# Altium PCB sbattery.PcbDoc (part 1 of 2)
Units mil, origin at the board's own origin, x right, y up, seen from the top; angles counter-clockwise.
Board outline 1265 x 1660 mil, 2 copper layers (Top Layer, Bottom Layer); 16 components, 14 nets, 58 pads, 16 vias.
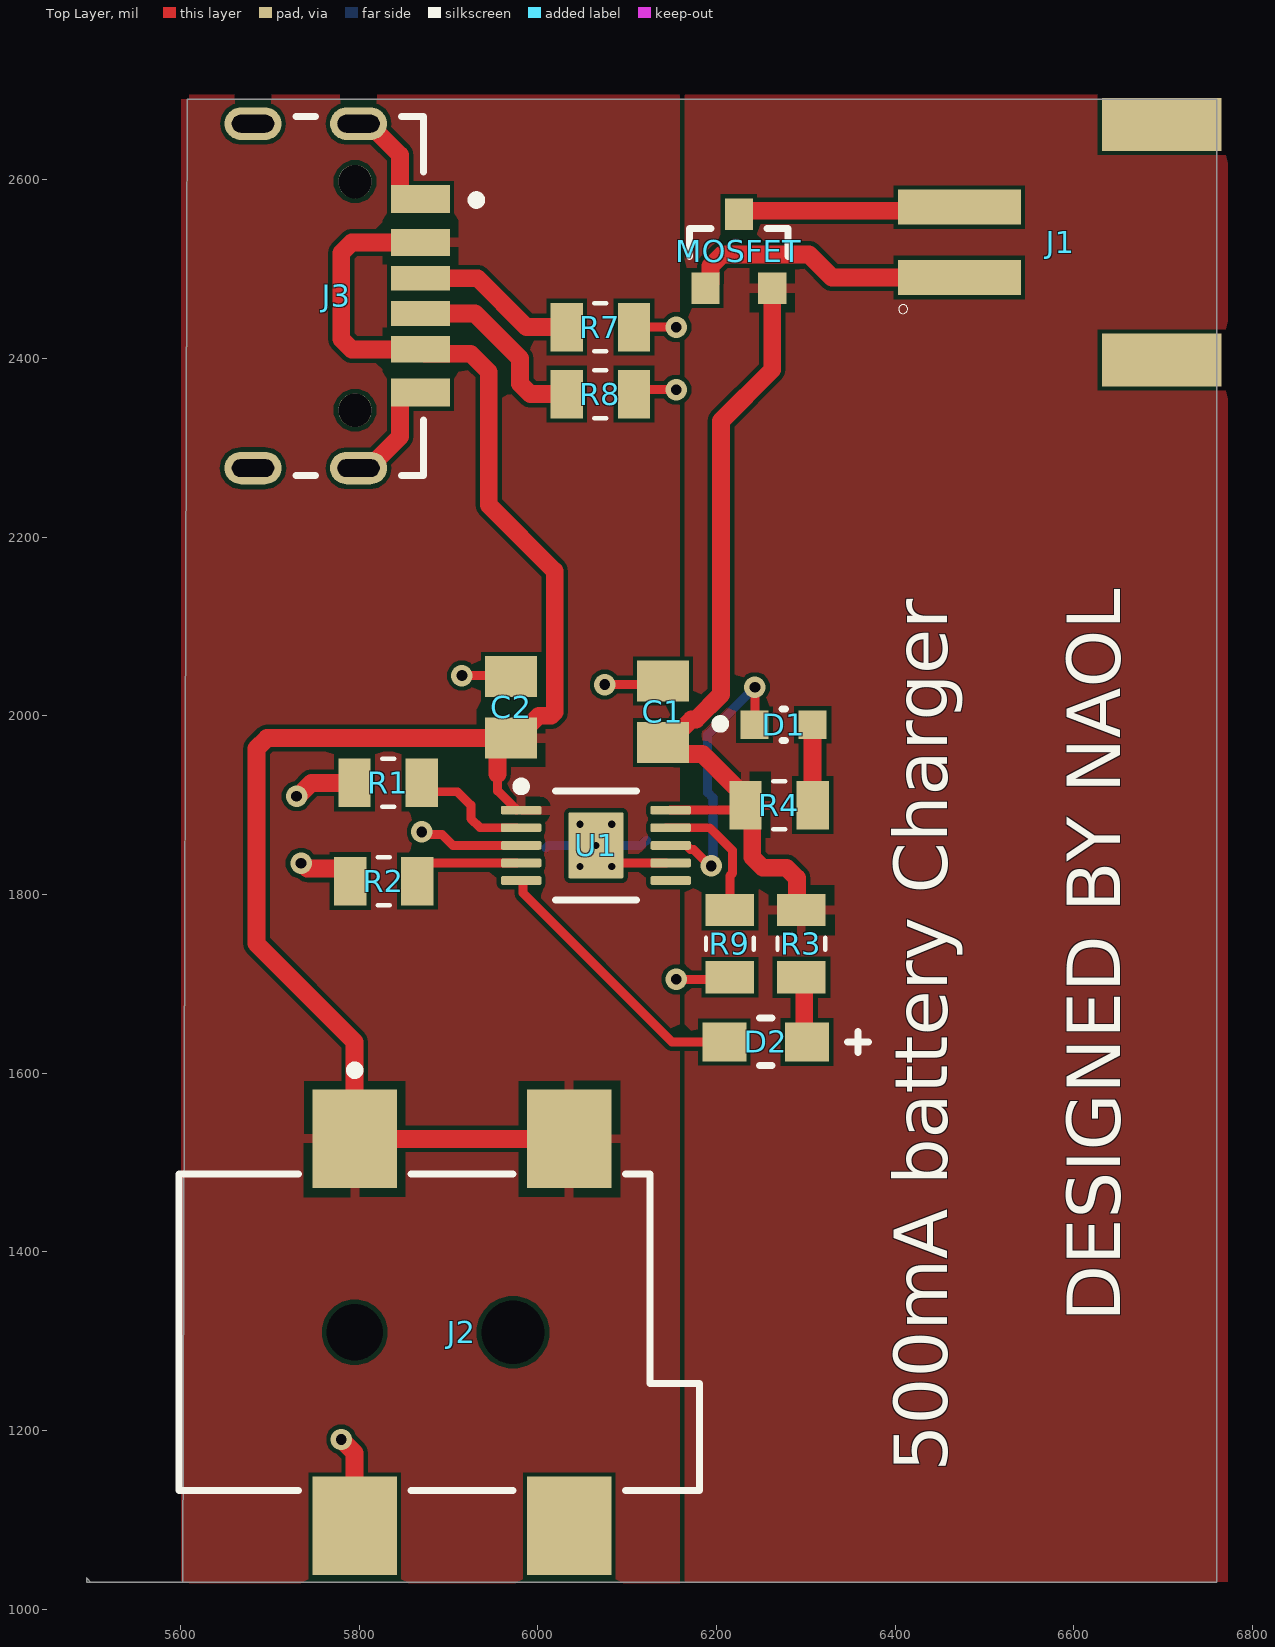
[diagram p0: Top Layer view]
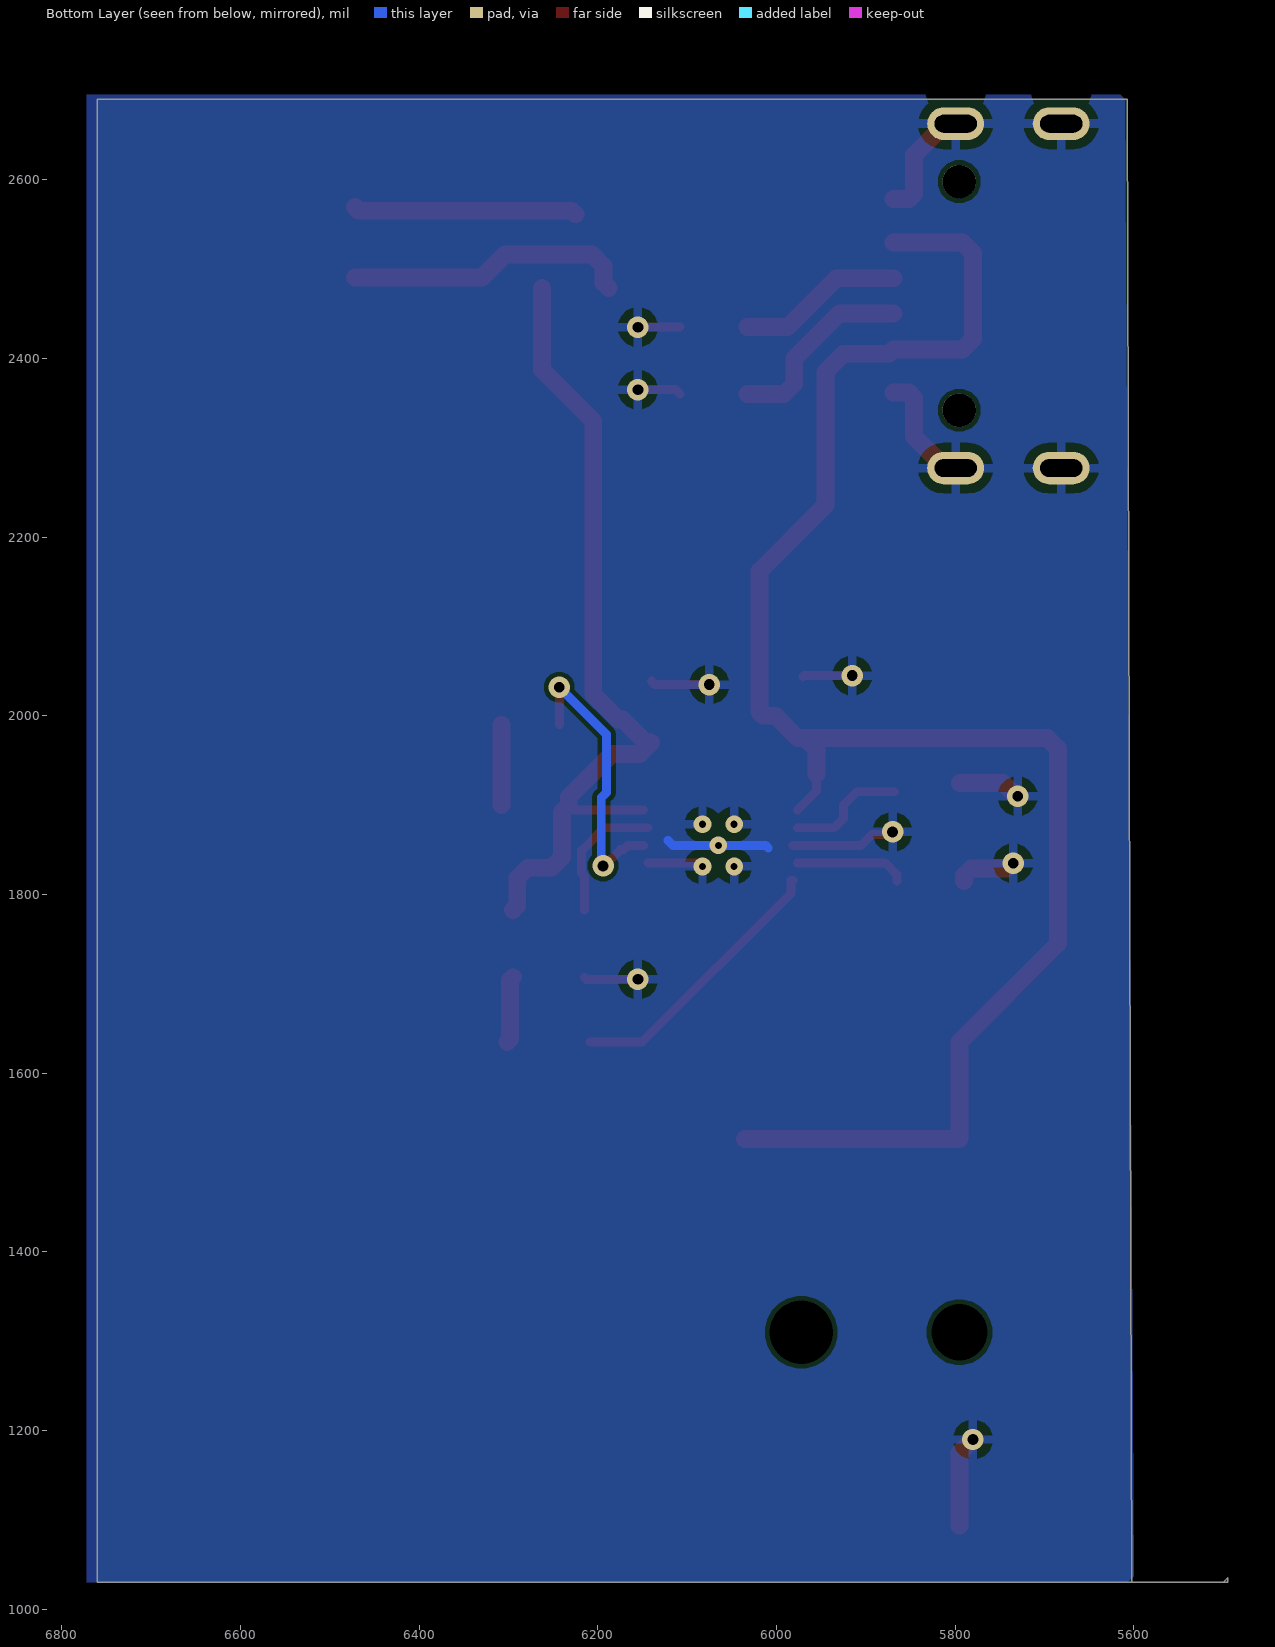
[diagram p1: Bottom Layer view, seen from below]
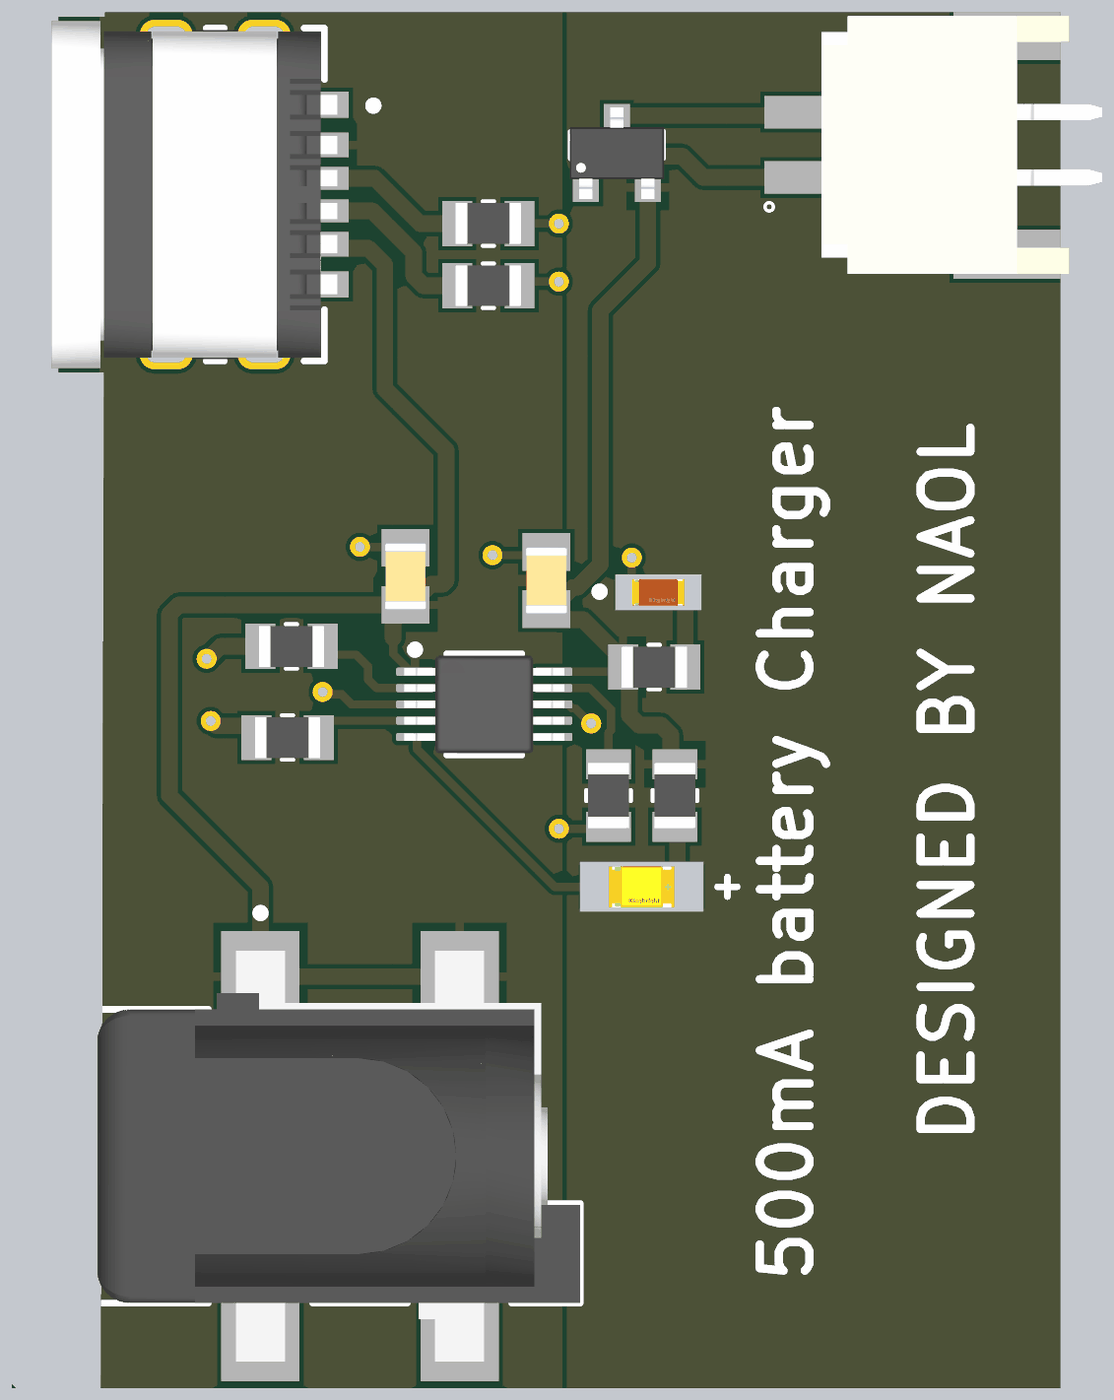
[diagram p2: 3D render of the assembled board from above, using the file's embedded part models]

## Layer stack, top to bottom
Top Solder: solder mask 0.4, Solder Resist, Dk 3.5
Top Layer: signal copper 1.4
Dielectric 1: dielectric 12.6, FR-4, Dk 4.8
Bottom Layer: signal copper 1.4
Bottom Solder: solder mask 0.4, Solder Resist, Dk 3.5

## Board outline
5607.46,2690 6760,2690 6760,1030 5500,1030 5495,1035 5495,1030 5602.45,1030

## Design rules (kind name [scope] priority, off if disabled: settings)
Clearance [All] p1: gap=5 ignorepadtopadclearanceinfootprint=FALSE
MinimumSolderMaskSliver [All] p1: minsoldermaskwidth=8
PolygonConnect [All] p1: connectstyle=Relief reliefconductorwidth=10 reliefentries=4 polygonreliefangle="90 Angle" airgapwidth=10
RoutingVias [All] p1: holewidth=28 width=50 viastyle="Through Hole" minholewidth=28 minwidth=50 maxholewidth=28 maxwidth=50
SolderMaskExpansion [All] p1: expansion=0 istentingtop=FALSE
SupplyNets "Schematic Supply Nets_2" [InNet('VOUT')] p1: voltage=0.000
SupplyNets "Schematic Supply Nets_1" [InNet('VCC')] p2: voltage=0.000
SupplyNets "Schematic Supply Nets" [InNet('GND')] p3: voltage=0.000
Width [All] p1: maxlimit=100 minlimit=10 preferedwidth=10
29 further rules are at their usual default settings.

## Classes and differential pairs
component class sbattery: C1 C2 D1 D2 J1 J2 J3 MOSFET R1 R3 R4 R7 R8 R9 U1

## Components (designator, comment, footprint, x,y, rotation, side; value= is the part's Value field where it differs from the comment)
C1 "4u7F" CAPC2012X88N 6140,2004.45 r90 top value=4.7uF
C2 "4u7F" CAPC2012X88N 5970,2009.45 r90 top value=4.7uF
D1 "APT1608EC" FP-APT1608EC-MFG 6275,1990 r0 top
D2 "APT1608SGC" FP-APT2012MGC-MFG 6255,1635 r180 top
J1 "S2B-PH-SM4-TB" JST_S2B-PH-SM4-TB 6585,2530 r270 top
J2 "Jack Connector" CUI_PJ-002AH-SMT-TR 5915.08,1310 r0 top
J3 "usbc" FP-217176-0001-MFG 5775,2470 r270 top
MOSFET "P CHANNEL" SOT23-3 6225,2520 r270 top
R1 "2k2Ω" RESC2012X60N 5832.4,1925 r0 top value=2.2kΩ
R2 "4k32Ω" RESC2012X60N 5827.6,1815 r0 top value=4.32kΩ
R3 "1k5Ω" RESC2012X60N 6295,1745 r90 top value=1.5kΩ
R4 "1k5Ω" RESC2012X60N 6270,1900 r180 top value=1.5kΩ
R7 "5k1Ω" RESC2012X60N 6070,2435 r180 top value=5.1kΩ
R8 "5k1Ω" RESC2012X60N 6070,2360 r180 top value=5.1kΩ
R9 "10kΩ" RESC2012X60N 6215,1745 r90 top
U1 "BQ24092DGQR" DGQ0010D_L 6065,1855 r0 top

## Footprints (in the part's own frame and the unit in brackets; to place one, negate y for a bottom-side part, rotate by r counter-clockwise, add the part's x,y. Pads: shape width x height; smd on the part's side, far side on the other; paste and mask are expansions set on the pad)
CAPC2012X88N [mm]
  rect 1.16x1.47 smd: 1(-0.875,0) 2(0.875,0)
  body extent -1.02,-0.64 1.02,0.64, height 1.4
CUI_PJ-002AH-SMT-TR [mm]
  rect 2.4x2.8 smd: 1(-3.05,5.5) 1(3.05,5.5) 2(-3.05,-5.5) 3(3.05,-5.5)
  round 0 hole 1.6: MH1(-3.05,0)
  round 0 hole 1.8: MH2(1.45,0)
  silkscreen extent -8.05,-4.5 6.75,7.57, body extent -8.05,-6.3 6.75,6.3, height 11.2
DGQ0010D_L [mm]
  rrect40% 1.15x0.25 smd: 1(-2.125,1) 2(-2.125,0.5) 3(-2.125,0) 4(-2.125,-0.5) 5(-2.125,-1) 6(2.125,-1) 7(2.125,-0.5) 8(2.125,0) 9(2.125,0.5) 10(2.125,1)
  rrect6% 1.57x1.88 smd: 11(0,0)
  silkscreen extent -2.25,-1.55 1.15,1.8, body extent -2.45,-1.5 2.45,1.5, height 0.94
FP-217176-0001-MFG [mm]
  rrect100% 0.92x1.62 hole 1.2 slot 0.5 at 0 deg paste-2539.97 mask+0: 1(-4.895,0.618) 2(4.895,0.618) 3(-4.895,-2.382) 4(4.895,-2.382)
  rect 0.8x1.67 smd paste+0 mask+0: C1(-2.75,2.383) C6(2.75,2.383)
  rect 0.76x1.67 smd paste+0 mask+0: C2(-1.52,2.383) C5(1.52,2.383)
  rect 0.7x1.67 smd paste+0 mask+0: C3(-0.5,2.383) C4(0.5,2.383)
  round 0.95 hole 0.95 unplated paste-2539.97 mask+0: ""(-3.25,0.518) ""(3.25,0.518)
  silkscreen extent -5.1,-1.16 5.1,4.09, body extent -5.46,-5.68 5.46,3.32, height 0.25
FP-APT1608EC-MFG [mm]
  rect 0.8x0.8 smd paste+0 mask+0: 1(-0.825,0) 2(0.825,0)
  silkscreen extent -1.92,-0.45 0.05,0.45, body extent -1.32,-0.55 1.33,0.55, height 0.25
FP-APT2012MGC-MFG [mm]
  rect 1.25x1.1 smd paste+0 mask+0: 1(-1.175,0) 2(1.175,0)
  silkscreen extent -2.93,-0.67 0.18,0.67, body extent -1.9,-0.77 1.9,0.77, height 0.25
JST_S2B-PH-SM4-TB [mm]
  rect 1x3.5 smd: 1(1,-2.875) 2(-1,-2.875)
  rect 1.5x3.4 smd: P1(3.35,2.875) P2(-3.35,2.875)
  silkscreen extent 1.77,-4.6 2.03,-4.35, body extent -3.95,-2.88 3.95,5.72, height 5.5
RESC2012X60N [mm]
  rect 0.92x1.38 smd: 1(-0.955,0) 2(0.955,0)
  silkscreen extent -0.17,-0.68 0.17,0.68, body extent -1,-0.63 1,0.63, height 0.6
SOT23-3 [mm]
  rect 0.9x0.8 smd: 1(1.05,-0.95) 2(1.05,0.95) 3(-1.05,0)
  silkscreen extent -0.65,-1.4 0.15,1.4, body extent -1.4,-1.45 1.4,1.45, height 1.25

## Part data
C1 C2: library part CC0805KFX7R7BB475, "Ceramic Capacitor, Ceramic, 16V, 10% +Tol, 10% -Tol, X7R, 0.15 TC, 4.7uF, Surface Mount, 0805", Case/Package=0805, Dielectric=X7R, Dielectric Material=Ceramic, LCSC part#=C20144929, Manufacturer="Yageo Group", Manufacturer Package Identifier=CC0805-0.85, Max Operating Temperature=125°C, Min Operating Temperature=-55°C, Supplier Part Number=13-CC0805KFX7R7BB475TR-ND, Voltage Rating=16V, Category="Ceramic Capacitors", China RoHS=Compliant, ComponentLink1Description=https://datasheet.octopart.com:443/CC0805KFX7R7BB475-Yageo-datasheet-177165144.pdf?src-supplier=IHS, ComponentLink1URL=https://datasheet.octopart.com:443/CC0805KFX7R7BB475-Yageo-datasheet-177165144.pdf?src-supplier=IHS, ComponentLink2Description=https://datasheet.octopart.com:443/CC0805KFX7R7BB475-Yageo-datasheet-78855689.pdf?src-supplier=Upverter, ComponentLink2URL=https://datasheet.octopart.com:443/CC0805KFX7R7BB475-Yageo-datasheet-78855689.pdf?src-supplier=Upverter, ComponentLink3Description=https://datasheet.octopart.com:443/CC0805KFX7R7BB475-Yageo-datasheet-181969532.pdf?src-supplier=Farnell, ComponentLink3URL=https://datasheet.octopart.com:443/CC0805KFX7R7BB475-Yageo-datasheet-181969532.pdf?src-supplier=Farnell, ComponentLink4Description=https://datasheet.octopart.com/CC0805KFX7R7BB475-Yageo-datasheet-10883670.pdf, ComponentLink4URL=https://datasheet.octopart.com/CC0805KFX7R7BB475-Yageo-datasheet-10883670.pdf, ComponentLink5Description=http://sigma.octopart.com:80/conflict_mineral_statement/Yageo-company-3.pdf?src-supplier=Compliance+Statements, ComponentLink5URL=http://sigma.octopart.com:80/conflict_mineral_statement/Yageo-company-3.pdf?src-supplier=Compliance+Statements, ComponentLink6Description=http://sigma.octopart.com:80/rohs_statement/Yageo-company-2.pdf?src-supplier=Compliance+Statements, ComponentLink6URL=http://sigma.octopart.com:80/rohs_statement/Yageo-company-2.pdf?src-supplier=Compliance+Statements, Country of Origin="Mainland China, Taiwan", Export Control Classification Number (ECCN) Code=EAR99, Halogen Free="Halogen Free", Harmonized Tariff Schedule (HTS) Code=8532.24.00.20, Height=1.25mm, Introduction Date=2013-05-20, Lead Free="Lead Free", Length=2mm, Lifecycle Status=Production, Manufacturer Part Number=CC0805KFX7R7BB475, Material=Ceramic, Mounting Technology="Surface Mount", Number of Terminals=2, Pricing="10000=0.12617, 30000=0.11755 (USD)", REACH SVHC=Unaffected, RoHS=Compliant, Stock=10000, Supplier=DigiKey, Voltage Rating (DC)=16V, Width=1.25mm
D1: "1.6X0.8 MM SMD CHIP LED LAMP Single Color LED, High Efficiency Red, Water Clear, 1.2mm", Case Code (Imperial)=0603, Case Code (Metric)=1608, Color=Red, Forward Current=30mA, Forward Voltage=2.5V, LCSC part#=C5554143, Lens Color=Clear, Manufacturer=Kingbright, Max Junction Temperature (Tj)=125°C, Max Operating Temperature=85°C, Min Operating Temperature=-40°C, Power Dissipation=75mW, Reverse Voltage=5V, Supplier Part Number=754-1117-1-ND, Test Current=20mA, Case/Package=0603, Category=LEDs, China RoHS=Compliant, ComponentLink1Description=https://datasheet.octopart.com:443/APT1608EC-Kingbright-datasheet-180517227.pdf?src-supplier=IHS, ComponentLink1URL=https://datasheet.octopart.com:443/APT1608EC-Kingbright-datasheet-180517227.pdf?src-supplier=IHS, ComponentLink2Description=https://datasheet.octopart.com:443/APT1608EC-Kingbright-datasheet-158247.pdf?src-supplier=IHS, ComponentLink2URL=https://datasheet.octopart.com:443/APT1608EC-Kingbright-datasheet-158247.pdf?src-supplier=IHS, ComponentLink3Description=https://datasheet.octopart.com:443/APT1608EC-Kingbright-datasheet-12510518.pdf?src-supplier=Upverter, ComponentLink3URL=https://datasheet.octopart.com:443/APT1608EC-Kingbright-datasheet-12510518.pdf?src-supplier=Upverter, ComponentLink4Description=https://datasheet.octopart.com:443/APT1608EC-Kingbright-datasheet-137321905.pdf?src-supplier=Sager+Electronics, ComponentLink4URL=https://datasheet.octopart.com:443/APT1608EC-Kingbright-datasheet-137321905.pdf?src-supplier=Sager+Electronics, ComponentLink5Description=https://datasheet.octopart.com:443/APT1608EC-Kingbright-datasheet-9700807.pdf?src-supplier=RS+(Formerly+Allied+Electronics), ComponentLink5URL=https://datasheet.octopart.com:443/APT1608EC-Kingbright-datasheet-9700807.pdf?src-supplier=RS+(Formerly+Allied+Electronics), Country of Origin="Mainland China", Dominant Wavelength=625nm, Harmonized Tariff Schedule (HTS) Code=8541.40.20.00, Height=750µm, Illumination Color=Red, Introduction Date=2000-01-01, Lead Free="Lead Free", Length=1.6mm, Lens Style="Clear, Flat", Lifecycle Status=Production, Luminous Intensity=12mcd, Manufacturer Part Number=APT1608EC, Mounting Technology="Surface Mount", Number of Circuits=1, Number of LEDs=1, Number of Terminals=2, Packaging="Tape & Reel (TR)", Peak Wavelength=627nm, Pins=2, Pricing="1=0.19, 10=0.129, 100=0.0899, 500=0.07172, 1000=0.06568 (USD)", REACH SVHC=Unaffected, RoHS=Compliant, Schedule B="8541402000, 8541402000|8541402000, 8541402000|8541402000|8541402000, 8541402000|8541402000|8541402000|8541402000", Shape=Rectangular, Stock=214921, Supplier=DigiKey, Terminal Pitch=1.3mm, Viewing Angle=120°, Wavelength=617nm, Width=800µm
D2: "LED High-Power Uni-Color Super Bright Green 565nm 2.2V 2-Pin Chip LED T/R", Case Code (Imperial)=0603, Case Code (Metric)=1608, Color=Green, Forward Current=25mA, Forward Voltage=2.5V, LCSC part#=C5875754, Lens Color=Clear, Manufacturer=Kingbright, Max Junction Temperature (Tj)=110°C, Max Operating Temperature=85°C, Min Operating Temperature=-40°C, Power Dissipation=62.5mW, Reverse Voltage=5V, Supplier Part Number=754-1121-1-ND, Test Current=20mA, Case/Package=0603, Category=LEDs, China RoHS=Compliant, ComponentLink1Description=https://datasheet.octopart.com:443/APT1608SGC-Kingbright-datasheet-180517294.pdf?src-supplier=IHS, ComponentLink1URL=https://datasheet.octopart.com:443/APT1608SGC-Kingbright-datasheet-180517294.pdf?src-supplier=IHS, ComponentLink2Description=https://datasheet.octopart.com:443/APT1608SGC-Kingbright-datasheet-158301.pdf?src-supplier=IHS, ComponentLink2URL=https://datasheet.octopart.com:443/APT1608SGC-Kingbright-datasheet-158301.pdf?src-supplier=IHS, ComponentLink3Description=https://datasheet.octopart.com:443/APT1608SGC-Kingbright-datasheet-8328416.pdf?src-supplier=Upverter, ComponentLink3URL=https://datasheet.octopart.com:443/APT1608SGC-Kingbright-datasheet-8328416.pdf?src-supplier=Upverter, Dominant Wavelength=568nm, Height=750µm, Illumination Color=Green, Lead Free="Lead Free", Length=1.6mm, Lens Style="Clear, Flat", Lifecycle Status=Production, Luminous Intensity=10mcd, Manufacturer Part Number=APT1608SGC, Mounting Technology="Surface Mount", Number of Circuits=1, Number of LEDs=1, Number of Terminals=2, Packaging="Tape & Reel (TR)", Peak Wavelength=565nm, Pins=2, Pricing="1=0.2, 10=0.137, 100=0.0953, 500=0.07602, 1000=0.06962 (USD)", REACH SVHC=Unaffected, RoHS=Compliant, Schedule B="8541402000, 8541402000|8541402000|8541402000|8541402000|8541402000|8541402000|8541402000|8541402000|8541402000|8541402000|8541402000|8541402000|8541402000|8541402000|8541402000|8541402000|8541402000|8541402000|8541402000|8541402000|8541402000|8541402000|8541402000|85", Shape=Rectangular, Stock=1784429, Supplier=DigiKey, Terminal Pitch=1.65mm, Viewing Angle=120°, Wavelength=568nm, Width=800µm
J1: "Board Connector, 2 Contact(s), 1 Row(s), Male, Right Angle, Surface Mount Terminal", Case/Package=SMD/SMT, Contact Resistance=20mΩ, Current Rating=2A, Dielectric Material=Polyamide, Insulation Resistance=1GΩ, Manufacturer=JST, Max Operating Temperature=85°C, Min Operating Temperature=-25°C, Ratings="CSA, TUV", Supplier Part Number=455-S2B-PH-SM4-TBCT-ND, Category="Card Edge Connectors", ComponentLink1Description=https://datasheet.octopart.com:443/S2B-PH-SM4-TB-JST-datasheet-15068535.pdf?src-supplier=IHS, ComponentLink1URL=https://datasheet.octopart.com:443/S2B-PH-SM4-TB-JST-datasheet-15068535.pdf?src-supplier=IHS, ComponentLink2Description=https://datasheet.octopart.com:443/S2B-PH-SM4-TB-JST-datasheet-12510261.pdf?src-supplier=TME, ComponentLink2URL=https://datasheet.octopart.com:443/S2B-PH-SM4-TB-JST-datasheet-12510261.pdf?src-supplier=TME, ComponentLink3Description=https://datasheet.octopart.com:443/S2B-PH-SM4-TB-JST-datasheet-159515011.pdf?src-supplier=HQonline, ComponentLink3URL=https://datasheet.octopart.com:443/S2B-PH-SM4-TB-JST-datasheet-159515011.pdf?src-supplier=HQonline, Contact Plating=Tin, Gender=Male, Height=5.5mm, Length=7.9mm, Lifecycle Status=Production, Manufacturer Part Number=S2B-PH-SM4-TB, Number of Poles=2, Number of Positions=2, Number of Rows=1, Orientation="Right Angle", Pins=2, Pitch=2.0066mm, Pricing="1=0.49, 10=0.417, 100=0.3547, 500=0.31654 (USD)", RoHS=Compliant, Stock=150546, Supplier=DigiKey, Terminal Pitch=2mm, Width=7.6mm
J2: library part PJ-002AH-SMT-TR, "2.0 x 6.5 mm, 5.0 A, Horizontal, Surface Mount (SMT), Dc Power Jack Connector", Current Rating=5A, LCSC part#=C2961147, Manufacturer="Same Sky", Max Operating Temperature=85°C, Min Operating Temperature=-25°C, Supplier Part Number=CP-002AHPJDKR-ND, Voltage Rating=24V, Category="Power Connectors", ComponentLink1Description=https://datasheet.octopart.com:443/PJ-002AH-SMT-TR-Same-Sky-datasheet-183081436.pdf?src-supplier=Same+Sky, ComponentLink1URL=https://datasheet.octopart.com:443/PJ-002AH-SMT-TR-Same-Sky-datasheet-183081436.pdf?src-supplier=Same+Sky, ComponentLink2Description=https://datasheet.octopart.com:443/PJ-002AH-SMT-TR-Same-Sky-datasheet-181917114.pdf?src-supplier=Same+Sky, ComponentLink2URL=https://datasheet.octopart.com:443/PJ-002AH-SMT-TR-Same-Sky-datasheet-181917114.pdf?src-supplier=Same+Sky, ComponentLink3Description=https://datasheet.octopart.com:443/PJ-002AH-SMT-TR-CUI-Devices-datasheet-175924689.pdf?src-supplier=Same+Sky, ComponentLink3URL=https://datasheet.octopart.com:443/PJ-002AH-SMT-TR-CUI-Devices-datasheet-175924689.pdf?src-supplier=Same+Sky, ComponentLink4Description=https://datasheet.octopart.com:443/PJ-002AH-SMT-TR-CUI-Devices-datasheet-137940666.pdf?src-supplier=Same+Sky, ComponentLink4URL=https://datasheet.octopart.com:443/PJ-002AH-SMT-TR-CUI-Devices-datasheet-137940666.pdf?src-supplier=Same+Sky, ComponentLink5Description=https://datasheet.octopart.com:443/PJ-002AH-SMT-TR-CUI-Devices-datasheet-180437148.pdf?src-supplier=IHS, ComponentLink5URL=https://datasheet.octopart.com:443/PJ-002AH-SMT-TR-CUI-Devices-datasheet-180437148.pdf?src-supplier=IHS, ComponentLink6Description=https://datasheet.octopart.com:443/PJ-002AH-SMT-TR-Same-Sky-datasheet-190141953.pdf?src-supplier=element14+APAC, ComponentLink6URL=https://datasheet.octopart.com:443/PJ-002AH-SMT-TR-Same-Sky-datasheet-190141953.pdf?src-supplier=element14+APAC, ComponentLink7Description=https://datasheet.octopart.com:443/PJ-002AH-SMT-TR-Same-Sky-datasheet-182880855.pdf?src-supplier=Electro+Sonic, ComponentLink7URL=https://datasheet.octopart.com:443/PJ-002AH-SMT-TR-Same-Sky-datasheet-182880855.pdf?src-supplier=Electro+Sonic, ComponentLink8Description=https://datasheet.octopart.com:443/PJ-002AH-SMT-TR-CUI-Devices-datasheet-175925525.pdf?src-supplier=Master+Electronics, ComponentLink8URL=https://datasheet.octopart.com:443/PJ-002AH-SMT-TR-CUI-Devices-datasheet-175925525.pdf?src-supplier=Master+Electronics, ComponentLink9Description=https://datasheet.octopart.com:443/PJ-002AH-SMT-TR-CUI-Devices-datasheet-141000103.pdf?src-supplier=Master+Electronics, ComponentLink9URL=https://datasheet.octopart.com:443/PJ-002AH-SMT-TR-CUI-Devices-datasheet-141000103.pdf?src-supplier=Master+Electronics, ComponentLink10Description=https://datasheet.octopart.com:443/PJ-002AH-SMT-TR-CUI-Devices-datasheet-103108616.pdf?src-supplier=Master+Electronics, ComponentLink10URL=https://datasheet.octopart.com:443/PJ-002AH-SMT-TR-CUI-Devices-datasheet-103108616.pdf?src-supplier=Master+Electronics, ComponentLink11Description=https://datasheet.octopart.com:443/PJ-002AH-SMT-TR-Same-Sky-datasheet-189105089.pdf?src-supplier=Master+Electronics, ComponentLink11URL=https://datasheet.octopart.com:443/PJ-002AH-SMT-TR-Same-Sky-datasheet-189105089.pdf?src-supplier=Master+Electronics, ComponentLink12Description=https://datasheet.octopart.com:443/PJ-002AH-SMT-TR-Same-Sky-datasheet-182049753.pdf?src-supplier=Future+Electronics, ComponentLink12URL=https://datasheet.octopart.com:443/PJ-002AH-SMT-TR-Same-Sky-datasheet-182049753.pdf?src-supplier=Future+Electronics, ComponentLink13Description=https://datasheet.octopart.com:443/PJ-002AH-SMT-TR-CUI-Devices-datasheet-175923546.pdf?src-supplier=Future+Electronics, ComponentLink13URL=https://datasheet.octopart.com:443/PJ-002AH-SMT-TR-CUI-Devices-datasheet-175923546.pdf?src-supplier=Future+Electronics, ComponentLink14Description=https://datasheet.octopart.com:443/PJ-002AH-SMT-TR-CUI-Devices-datasheet-137760669.pdf?src-supplier=Future+Electronics, ComponentLink14URL=https://datasheet.octopart.com:443/PJ-002AH-SMT-TR-CUI-Devices-datasheet-137760669.pdf?src-supplier=Future+Electronics, ComponentLink15Description=https://datasheet.octopart.com:443/PJ-002AH-SMT-TR-CUI-Devices-datasheet-175927503.pdf?src-supplier=CUI+Devices+SCT, ComponentLink15URL=https://datasheet.octopart.com:443/PJ-002AH-SMT-TR-CUI-Devices-datasheet-175927503.pdf?src-supplier=CUI+Devices+SCT, ComponentLink16Description=https://datasheet.octopart.com:443/PJ-002AH-SMT-TR-CUI-Devices-datasheet-142370533.pdf?src-supplier=CUI+Devices+SCT, ComponentLink16URL=https://datasheet.octopart.com:443/PJ-002AH-SMT-TR-CUI-Devices-datasheet-142370533.pdf?src-supplier=CUI+Devices+SCT, ComponentLink17Description=https://octopart.com:443/opatz8j6/c1?t=kYIPSAR_gxUrGLbD9baLFzEuLKDMD5QbHOfTDtLDkIqxLNdFXvSU7Zzvbvr2f7sXWfJxGRNhyTJmv_QM2CcXh6cB5txDjHKaRxA5LmQs8X3aOvPrphm1D1Gy4PUj3vydGShGnZzSROeM_0jDyTswWqCxsUuZ_G6TA39kgUgXMsYisotAvci6PBnwfHqprWkdovafhHLXXr438B9LgzH30NnnvdlFCxTuLfhx65YnuPwilhRuSo-RN6yLVuYx4bYU1Kz2gKifPRymKpwQpeAPMT-vPCIQg4kms4wOaB4PSnPbik8Fpc3R-s-2nw5NXz5D3_1YqpzlG--L1JdtoD8M3IP8kJK4AiMg9MwAvbI&src-supplier=Compliance+Statements, ComponentLink17URL=https://octopart.com:443/opatz8j6/c1?t=kYIPSAR_gxUrGLbD9baLFzEuLKDMD5QbHOfTDtLDkIqxLNdFXvSU7Zzvbvr2f7sXWfJxGRNhyTJmv_QM2CcXh6cB5txDjHKaRxA5LmQs8X3aOvPrphm1D1Gy4PUj3vydGShGnZzSROeM_0jDyTswWqCxsUuZ_G6TA39kgUgXMsYisotAvci6PBnwfHqprWkdovafhHLXXr438B9LgzH30NnnvdlFCxTuLfhx65YnuPwilhRuSo-RN6yLVuYx4bYU1Kz2gKifPRymKpwQpeAPMT-vPCIQg4kms4wOaB4PSnPbik8Fpc3R-s-2nw5NXz5D3_1YqpzlG--L1JdtoD8M3IP8kJK4AiMg9MwAvbI&src-supplier=Compliance+Statements, ComponentLink18Description=https://octopart.com:443/opatz8j6/c1?t=fCyWSj1jxHABX9bt1We-nBaONF-MKDyrdplWq9Ug6JX_mli73eFFCsHYdxw9c0yzn_n1hCXT5_MgR08zVo_XE-0LRftrscC4ncIG4fChnThfa4QkZ7D2kog3cmEkcq4mR6SQXbgR_BVap4JxImoweEwxe7EsrUn-gPrEzMW2H8ciz9OuWAMpPZ_4ifjdUiW6Du80lifleXXgru2rFP4QuH4Xg6petDpd_ciFnpWCXseW6pV3jSW7cwaSt3UROAB3Rgj_aBuMIzOubfE_Z-csyZ2KwTmrt1iiK2dgwigDFraz9g52IgOt5U_Koq0hn0IZE5PScfFEQBZO3DXy-6P3QmCScIzCxDK0aqapQeudmZ-b&src-supplier=Compliance+Statements, ComponentLink18URL=https://octopart.com:443/opatz8j6/c1?t=fCyWSj1jxHABX9bt1We-nBaONF-MKDyrdplWq9Ug6JX_mli73eFFCsHYdxw9c0yzn_n1hCXT5_MgR08zVo_XE-0LRftrscC4ncIG4fChnThfa4QkZ7D2kog3cmEkcq4mR6SQXbgR_BVap4JxImoweEwxe7EsrUn-gPrEzMW2H8ciz9OuWAMpPZ_4ifjdUiW6Du80lifleXXgru2rFP4QuH4Xg6petDpd_ciFnpWCXseW6pV3jSW7cwaSt3UROAB3Rgj_aBuMIzOubfE_Z-csyZ2KwTmrt1iiK2dgwigDFraz9g52IgOt5U_Koq0hn0IZE5PScfFEQBZO3DXy-6P3QmCScIzCxDK0aqapQeudmZ-b&src-supplier=Compliance+Statements, ComponentLink19Description=https://octopart.com:443/opatz8j6/c1?t=0G-ZbAozWDGaR5fAvdYjYVtahk3gonqNyEJgXYJdug8omsuN04aVXyE58rj41QlRKAj4lmPkVISqHmGdARiA99ILvFFkrrxah6GHPw6icDB6trS5MVDK3fgU_a4dZEeAnpK2Ogvp-0yutgNUwIMmgdbXs2uUjS2mosDdu4tICyz8yilXvZVabm6iwhWmm8-jY6OOJQggx-TMn65xiw5RMquBda3qZwV9eRGf3QHlh-G12LhJ3Hu32jBT-ZU5ne2OObtiOfBcZ5xkNxnCIi8vCc_XFZUgAheXvRHUilqF4Lu3rtnHWfWuyEiixHsIJalKzzqq94ThQJalGNRoZr9AuwcZBJKcZfHq-pyA3Uw&src-supplier=Compliance+Statements, ComponentLink19URL=https://octopart.com:443/opatz8j6/c1?t=0G-ZbAozWDGaR5fAvdYjYVtahk3gonqNyEJgXYJdug8omsuN04aVXyE58rj41QlRKAj4lmPkVISqHmGdARiA99ILvFFkrrxah6GHPw6icDB6trS5MVDK3fgU_a4dZEeAnpK2Ogvp-0yutgNUwIMmgdbXs2uUjS2mosDdu4tICyz8yilXvZVabm6iwhWmm8-jY6OOJQggx-TMn65xiw5RMquBda3qZwV9eRGf3QHlh-G12LhJ3Hu32jBT-ZU5ne2OObtiOfBcZ5xkNxnCIi8vCc_XFZUgAheXvRHUilqF4Lu3rtnHWfWuyEiixHsIJalKzzqq94ThQJalGNRoZr9AuwcZBJKcZfHq-pyA3Uw&src-supplier=Compliance+Statements, ComponentLink20Description=https://octopart.com:443/opatz8j6/c1?t=O9FJ77n277rZYT1vkW-sWDyE1Ea4dVQNwVeXrCs_O4FYIapCNdmThiJo2jJrijPrL5plgIdh588x2jFYVz6_ITNsv76ycHfSK8IUBrcl_7pxBzvZPRWXWk3EBfsemLjM5yV3VaWa1Vo-8vRT0cyQB5zJkMm-fcl1dDgpq3pzZBR-jy3vPTE_fAtu0Xoza9pCNi_-J4HQu4RdNbXTh_Ts3xIhgv7O5lVkarbUzKhnZRmGVQS2fagVjKU-i7LcVv1hTKNIVRxniNVql0YCjdDdjd0--Hqa6cpsza62t2-gsN6fkLgXXcnbAoJISjka-kHDmTuIB7ntE-61a8hiS-W_NX0-Y6auNOsYkr9uJQIUeTVs&src-supplier=Compliance+Statements, ComponentLink20URL=https://octopart.com:443/opatz8j6/c1?t=O9FJ77n277rZYT1vkW-sWDyE1Ea4dVQNwVeXrCs_O4FYIapCNdmThiJo2jJrijPrL5plgIdh588x2jFYVz6_ITNsv76ycHfSK8IUBrcl_7pxBzvZPRWXWk3EBfsemLjM5yV3VaWa1Vo-8vRT0cyQB5zJkMm-fcl1dDgpq3pzZBR-jy3vPTE_fAtu0Xoza9pCNi_-J4HQu4RdNbXTh_Ts3xIhgv7O5lVkarbUzKhnZRmGVQS2fagVjKU-i7LcVv1hTKNIVRxniNVql0YCjdDdjd0--Hqa6cpsza62t2-gsN6fkLgXXcnbAoJISjka-kHDmTuIB7ntE-61a8hiS-W_NX0-Y6auNOsYkr9uJQIUeTVs&src-supplier=Compliance+Statements, Contact Plating=Silver, Country of Origin="Mainland China", Export Control Classification Number (ECCN) Code=EAR99, Harmonized Tariff Schedule (HTS) Code=8536.69.40.20, Inside Diameter=2mm, Introduction Date=2015-12-23, Lifecycle Status=Production, Manufacturer Part Number=PJ-002AH-SMT-TR, Mounting Technology="Surface Mount", Number of Conductors=2, Orientation=Horizontal, Outside Diameter=6.5mm, Pins=2, Pricing="1=1.31, 10=1.109, 25=1.0396, 50=0.99, 100=0.9426 (USD)", REACH SVHC=Unaffected, RoHS=Compliant, Schedule B=8536695050, Shielding=Unshielded, Stock=87808, Supplier=DigiKey, Voltage Rating (DC)=24V
J3: library part 217176-0001, "USB Connector, Receptacle, USB 2.0, USB Type C, 6 Ways, Gold, SMT, Right Angle, Copper Alloy", Contact Resistance=50mΩ, Current Rating=1.25A, Insulation Color=Black, Insulation Resistance=100MΩ, LCSC part#=C3197950, Manufacturer=Molex, Manufacturer Lifecycle Status=ACTIVE, Max Operating Temperature=85°C, Min Operating Temperature=-40°C, Voltage Rating=30V, Category="USB Connectors", China RoHS=Compliant, ComponentLink1Description=https://sigma.octopart.com:443/158830329/technical_drawing/Molex-217176-0001.pdf?src-supplier=Upverter, ComponentLink1URL=https://sigma.octopart.com:443/158830329/technical_drawing/Molex-217176-0001.pdf?src-supplier=Upverter, ComponentLink2Description=https://datasheet.octopart.com:443/217176-0001-Molex-datasheet-164573281.pdf?src-supplier=RS+(Formerly+Allied+Electronics), ComponentLink2URL=https://datasheet.octopart.com:443/217176-0001-Molex-datasheet-164573281.pdf?src-supplier=RS+(Formerly+Allied+Electronics), ComponentLink3Description=http://sigma.octopart.com:80/reach_statement/Molex-company-74.pdf?src-supplier=Compliance+Statements, ComponentLink3URL=http://sigma.octopart.com:80/reach_statement/Molex-company-74.pdf?src-supplier=Compliance+Statements, ComponentLink4Description=http://sigma.octopart.com:80/rohs_statement/Molex-company-73.pdf?src-supplier=Compliance+Statements, ComponentLink4URL=http://sigma.octopart.com:80/rohs_statement/Molex-company-73.pdf?src-supplier=Compliance+Statements, ComponentLink5Description=http://sigma.octopart.com:80/conflict_mineral_statement/Molex-company-72.pdf?src-supplier=Compliance+Statements, ComponentLink5URL=http://sigma.octopart.com:80/conflict_mineral_statement/Molex-company-72.pdf?src-supplier=Compliance+Statements, Contact Material="Gold, Nickel", Country of Origin="Mainland China", Export Control Classification Number (ECCN) Code=EAR99, Gender=Female, Harmonized Tariff Schedule (HTS) Code=8536.69.40.30, Introduction Date=2021-08-26, Lifecycle Status=Production, Manufacturer Part Number=217176-0001, Number of Contacts=6, Number of Ports=1, Number of Positions=6, Number of Rows=1, Orientation="Right Angle", Pins=6, Plating Thickness=25.4nm, Pricing="3600=1.1115, 10800=0.95376, 21600=0.91268, 43200=0.84734, 100800=0.8202 (USD)", REACH SVHC=Unaffected, RoHS=Compliant, Shell Finish=Nickel, Shell Material="Stainless Steel", Stock=32400, Supplier=Avnet, Supplier Part Number=217176-0001, Terminal Pitch=1.02mm, USB Standard="USB 2.0"
MOSFET: library part AO3401A, "Transistor: P-MOSFET; unipolar; -30V; 4, 2A; 1, 4W; 85 mOhm; ; -55+150 st.C; SMD; SOT23", Case/Package=TO-236-3, Continuous Drain Current (ID)=4A, Drain to Source Breakdown Voltage=-30V, Drain to Source Resistance=50mΩ, Gate to Source Voltage (Vgs)=12V, Input Capacitance=1.2nF, LCSC part#=C15127, Manufacturer="Alpha & Omega Semiconductor", Max Junction Temperature (Tj)=150°C, Max Power Dissipation=1.4W, Min Breakdown Voltage=30V, Min Operating Temperature=-55°C, Supplier Part Number=785-1001-1-ND, Threshold Voltage=-900mV, Category=MOSFETs, ComponentLink1Description=https://datasheet.octopart.com:443/AO3401A-Alpha-%26-Omega-Semiconductor-datasheet-11631723.pdf?src-supplier=IHS, ComponentLink1URL=https://datasheet.octopart.com:443/AO3401A-Alpha-%26-Omega-Semiconductor-datasheet-11631723.pdf?src-supplier=IHS, ComponentLink2Description=https://sigma.octopart.com:443/138895710/technical_drawing/Alpha-%26-Omega-Semiconductor-AO3401A.pdf?src-supplier=Upverter, ComponentLink2URL=https://sigma.octopart.com:443/138895710/technical_drawing/Alpha-%26-Omega-Semiconductor-AO3401A.pdf?src-supplier=Upverter, ComponentLink3Description=https://sigma.octopart.com:443/140150677/technical_drawing/Alpha-%26-Omega-Semiconductor-AO3401A.pdf?src-supplier=Alpha+%26+Omega+Semiconductor+SCT, ComponentLink3URL=https://sigma.octopart.com:443/140150677/technical_drawing/Alpha-%26-Omega-Semiconductor-AO3401A.pdf?src-supplier=Alpha+%26+Omega+Semiconductor+SCT, ComponentLink4Description=https://datasheet.octopart.com:443/AO3401A-Alpha-%26-Omega-Semiconductor-datasheet-14060796.pdf?src-supplier=iiiC, ComponentLink4URL=https://datasheet.octopart.com:443/AO3401A-Alpha-%26-Omega-Semiconductor-datasheet-14060796.pdf?src-supplier=iiiC, Country of Origin="Mainland China", Drain to Source Voltage (Vds)=-30V, Export Control Classification Number (ECCN) Code=EAR99, Height=1.25mm, Introduction Date=2007-04-10, Lead Free="Lead Free", Lifecycle Status=Production, Manufacturer Part Number=AO3401A, Max Operating Temperature=150°C, Mounting Technology="Surface Mount", Number of Channels=1, Number of Elements=1, Number of Terminals=3, Pins=3, Power Dissipation=1.4W, Pricing="1=0.52, 10=0.322, 50=0.2332, 100=0.2043, 500=0.15316 (USD)", Radiation Hardening=No, Rds On Max=44mΩ, REACH SVHC=Unaffected, RoHS=Compliant, Schedule B="8541290080, 8541290080|8541290080|8541290080|8541290080|8541290080", Stock=390499, Supplier=DigiKey, Turn-Off Delay Time=41ns, Turn-On Delay Time=6.5ns
R1: library part RC0805FR-072K2L, "125Mw Thick Film Resistors 100Ppm/ 1% 2.2K 0805 Chip Resistor Surface Mount Rohs", Case Code (Imperial)=0805, LCSC part#=C114561, Manufacturer="Yageo Group", Max Operating Temperature=155°C, Max Power Dissipation=125mW, Min Operating Temperature=-55°C, Supplier Part Number=311-2.20KCRCT-ND, Temperature Coefficient=100ppm/°C, Tolerance=1%, Voltage Rating=150V, Case/Package=0805, Category="Chip SMD Resistors", China RoHS=Non-Compliant, ComponentLink1Description=https://datasheet.octopart.com:443/RC0805FR-072K2L-Yageo-datasheet-175887523.pdf?src-supplier=element14+APAC, ComponentLink1URL=https://datasheet.octopart.com:443/RC0805FR-072K2L-Yageo-datasheet-175887523.pdf?src-supplier=element14+APAC, ComponentLink2Description=https://datasheet.octopart.com:443/RC0805FR-072K2L-Yageo-datasheet-62067350.pdf?src-supplier=element14+APAC, ComponentLink2URL=https://datasheet.octopart.com:443/RC0805FR-072K2L-Yageo-datasheet-62067350.pdf?src-supplier=element14+APAC, ComponentLink3Description=https://datasheet.octopart.com:443/RC0805FR-072K2L-Yageo-datasheet-103092701.pdf?src-supplier=Upverter, ComponentLink3URL=https://datasheet.octopart.com:443/RC0805FR-072K2L-Yageo-datasheet-103092701.pdf?src-supplier=Upverter, ComponentLink4Description=https://datasheet.octopart.com:443/RC0805FR-072K2L-Yageo-datasheet-8330313.pdf?src-supplier=Newark, ComponentLink4URL=https://datasheet.octopart.com:443/RC0805FR-072K2L-Yageo-datasheet-8330313.pdf?src-supplier=Newark, ComponentLink5Description=https://datasheet.octopart.com:443/RC0805FR-072K2L-Yageo-Group-datasheet-190305687.pdf?src-supplier=Newark, ComponentLink5URL=https://datasheet.octopart.com:443/RC0805FR-072K2L-Yageo-Group-datasheet-190305687.pdf?src-supplier=Newark, ComponentLink6Description=https://datasheet.octopart.com:443/RC0805FR-072K2L-Yageo-Group-datasheet-176638170.pdf?src-supplier=Future+Electronics, ComponentLink6URL=https://datasheet.octopart.com:443/RC0805FR-072K2L-Yageo-Group-datasheet-176638170.pdf?src-supplier=Future+Electronics, ComponentLink7Description=https://datasheet.octopart.com:443/RC0805FR-072K2L-Yageo-datasheet-164759695.pdf?src-supplier=Future+Electronics, ComponentLink7URL=https://datasheet.octopart.com:443/RC0805FR-072K2L-Yageo-datasheet-164759695.pdf?src-supplier=Future+Electronics, ComponentLink8Description=https://datasheet.octopart.com:443/RC0805FR-072K2L-Yageo-datasheet-12592811.pdf?src-supplier=Future+Electronics, ComponentLink8URL=https://datasheet.octopart.com:443/RC0805FR-072K2L-Yageo-datasheet-12592811.pdf?src-supplier=Future+Electronics, ComponentLink9Description=https://datasheet.octopart.com:443/RC0805FR-072K2L-Yageo-datasheet-8324252.pdf?src-supplier=Future+Electronics, ComponentLink9URL=https://datasheet.octopart.com:443/RC0805FR-072K2L-Yageo-datasheet-8324252.pdf?src-supplier=Future+Electronics, ComponentLink10Description=https://datasheet.octopart.com:443/RC0805FR-072K2L-Yageo-datasheet-79472498.pdf?src-supplier=Megastar, ComponentLink10URL=https://datasheet.octopart.com:443/RC0805FR-072K2L-Yageo-datasheet-79472498.pdf?src-supplier=Megastar, ComponentLink11Description=https://datasheet.octopart.com/RC0805FR-072K2L-Yageo-datasheet-73766026.pdf, ComponentLink11URL=https://datasheet.octopart.com/RC0805FR-072K2L-Yageo-datasheet-73766026.pdf, ComponentLink12Description=https://datasheet.octopart.com:443/RC0805FR-072K2L-Yageo-datasheet-13691069.pdf?src-supplier=Farnell, ComponentLink12URL=https://datasheet.octopart.com:443/RC0805FR-072K2L-Yageo-datasheet-13691069.pdf?src-supplier=Farnell, ComponentLink13Description=https://datasheet.octopart.com:443/RC0805FR-072K2L-Yageo-datasheet-118657.pdf?src-supplier=DigiKey, ComponentLink13URL=https://datasheet.octopart.com:443/RC0805FR-072K2L-Yageo-datasheet-118657.pdf?src-supplier=DigiKey, ComponentLink14Description=http://sigma.octopart.com:80/conflict_mineral_statement/Yageo-company-3.pdf?src-supplier=Compliance+Statements, ComponentLink14URL=http://sigma.octopart.com:80/conflict_mineral_statement/Yageo-company-3.pdf?src-supplier=Compliance+Statements, ComponentLink15Description=http://sigma.octopart.com:80/rohs_statement/Yageo-company-2.pdf?src-supplier=Compliance+Statements, ComponentLink15URL=http://sigma.octopart.com:80/rohs_statement/Yageo-company-2.pdf?src-supplier=Compliance+Statements, Composition="Thick Film", Contact Plating=Tin, Depth=1.25mm, Features="Moisture Resistant", Height=500µm, Lead Free="Lead Free", Lead Pitch=400µm, Length=2mm, Lifecycle Status=Production, Manufacturer Part Number=RC0805FR-072K2L, Military Standard=Not, Mounting Technology="Surface Mount", Number of Terminals=2, Number of Terminations=2, Packaging="Tape & Reel", Pins=2, Power Rating=125mW, Pricing="1=0.1, 10=0.034, 25=0.0256, 50=0.0208, 100=0.0171, 250=0.01344, 500=0.01136, 1000=0.00973 (USD)", Radiation Hardening=No, REACH SVHC=Unaffected, RoHS=Compliant, Schedule B="8533210045, 8533210045|8533210045, 8533210045|8533210045|8533210045, 8533210045|8533210045|8533210045|8533210045", Stock=451947, Supplier=DigiKey, Termination=SMD/SMT, Voltage Rating (AC)=150V, Voltage Rating (DC)=150V, Width=1.25mm, Working Voltage=150V
R2: library part RC0805FR-074K32L, "Res Thick Film 0805 4.32K Ohm 1% 0.125W(1/8W) ±100ppm/C Pad SMD T/R", Case Code (Imperial)=0805, LCSC part#=C483139, Manufacturer="Yageo Group", Manufacturer Package Identifier="0805 (2012 metric)", Max Operating Temperature=155°C, Max Power Dissipation=125mW, Min Operating Temperature=-55°C, Supplier Part Number=311-4.32KCRCT-ND, Temperature Coefficient=100ppm/°C, Tolerance=1%, Voltage Rating=150V, Case/Package=0805, Category="Chip SMD Resistors", China RoHS=Non-Compliant, ComponentLink1Description=https://datasheet.octopart.com:443/RC0805FR-074K32L-Yageo-datasheet-175887523.pdf?src-supplier=IHS, ComponentLink1URL=https://datasheet.octopart.com:443/RC0805FR-074K32L-Yageo-datasheet-175887523.pdf?src-supplier=IHS, ComponentLink2Description=https://datasheet.octopart.com:443/RC0805FR-074K32L-Yageo-datasheet-103092701.pdf?src-supplier=Upverter, ComponentLink2URL=https://datasheet.octopart.com:443/RC0805FR-074K32L-Yageo-datasheet-103092701.pdf?src-supplier=Upverter, ComponentLink3Description=https://datasheet.octopart.com:443/RC0805FR-074K32L-Yageo-Group-datasheet-176638170.pdf?src-supplier=Future+Electronics, ComponentLink3URL=https://datasheet.octopart.com:443/RC0805FR-074K32L-Yageo-Group-datasheet-176638170.pdf?src-supplier=Future+Electronics, ComponentLink4Description=https://datasheet.octopart.com:443/RC0805FR-074K32L-Yageo-datasheet-164759695.pdf?src-supplier=Future+Electronics, ComponentLink4URL=https://datasheet.octopart.com:443/RC0805FR-074K32L-Yageo-datasheet-164759695.pdf?src-supplier=Future+Electronics, ComponentLink5Description=https://datasheet.octopart.com:443/RC0805FR-074K32L-Yageo-datasheet-12592811.pdf?src-supplier=Future+Electronics, ComponentLink5URL=https://datasheet.octopart.com:443/RC0805FR-074K32L-Yageo-datasheet-12592811.pdf?src-supplier=Future+Electronics, ComponentLink6Description=https://datasheet.octopart.com:443/RC0805FR-074K32L-Yageo-datasheet-8324252.pdf?src-supplier=Future+Electronics, ComponentLink6URL=https://datasheet.octopart.com:443/RC0805FR-074K32L-Yageo-datasheet-8324252.pdf?src-supplier=Future+Electronics, ComponentLink7Description=https://datasheet.octopart.com:443/RC0805FR-074K32L-Yageo-datasheet-8330313.pdf?src-supplier=Burklin+Elektronik, ComponentLink7URL=https://datasheet.octopart.com:443/RC0805FR-074K32L-Yageo-datasheet-8330313.pdf?src-supplier=Burklin+Elektronik, ComponentLink8Description=https://datasheet.octopart.com:443/RC0805FR-074K32L-Yageo-Group-datasheet-189192902.pdf?src-supplier=TME, ComponentLink8URL=https://datasheet.octopart.com:443/RC0805FR-074K32L-Yageo-Group-datasheet-189192902.pdf?src-supplier=TME, ComponentLink9Description=https://datasheet.octopart.com/RC0805FR-074K32L-Yageo-datasheet-73766026.pdf, ComponentLink9URL=https://datasheet.octopart.com/RC0805FR-074K32L-Yageo-datasheet-73766026.pdf, ComponentLink10Description=https://datasheet.octopart.com:443/RC0805FR-074K32L-Yageo-datasheet-118657.pdf?src-supplier=DigiKey, ComponentLink10URL=https://datasheet.octopart.com:443/RC0805FR-074K32L-Yageo-datasheet-118657.pdf?src-supplier=DigiKey, ComponentLink11Description=http://sigma.octopart.com:80/conflict_mineral_statement/Yageo-company-3.pdf?src-supplier=Compliance+Statements, ComponentLink11URL=http://sigma.octopart.com:80/conflict_mineral_statement/Yageo-company-3.pdf?src-supplier=Compliance+Statements, ComponentLink12Description=http://sigma.octopart.com:80/rohs_statement/Yageo-company-2.pdf?src-supplier=Compliance+Statements, ComponentLink12URL=http://sigma.octopart.com:80/rohs_statement/Yageo-company-2.pdf?src-supplier=Compliance+Statements, Composition="Thick Film", Contact Plating="Lead, Tin", Country of Origin="Mainland China, Taiwan", Depth=1.25mm, Export Control Classification Number (ECCN) Code=EAR99, Features="Moisture Resistant", Harmonized Tariff Schedule (HTS) Code=8533.21.00.30, Height=500µm, Introduction Date=2004-09-22, Lead Free="Lead Free", Length=2mm, Lifecycle Status=Production, Manufacturer Part Number=RC0805FR-074K32L, Military Standard=Not, Mounting Technology="Surface Mount", Number of Terminals=2, Number of Terminations=2, Power Rating=125mW, Pricing="1=0.1, 10=0.034, 25=0.0256, 50=0.0208, 100=0.0171, 250=0.01344, 500=0.01136, 1000=0.00973 (USD)", Radiation Hardening=No, REACH SVHC=Unaffected, RoHS=Compliant, Schedule B="8533210045, 8533210045|8533210045, 8533210045|8533210045|8533210045, 8533210045|8533210045|8533210045|8533210045", Stock=2956, Supplier=DigiKey, Termination=SMD/SMT, Voltage Rating (DC)=150V, Width=1.25mm, Working Voltage=150V
R3 R4: library part RC0805JR-131K5L, "Res Thick Film 0805 1.5K Ohm 5% 0.125W(1/8W) ±100ppm/C Pad SMD T/R", Case Code (Imperial)=0805, Case Code (Metric)=2012, LCSC part#=C114737, Manufacturer="Yageo Group", Max Operating Temperature=155°C, Min Operating Temperature=-55°C, Power Rating=125mW, Supplier Part Number=13-RC0805JR-131K5LCT-ND, Temperature Coefficient=100ppm/°C, Tolerance=5%, Voltage Rating=150V, Case/Package=0805, Category="Chip SMD Resistors", China RoHS=Non-Compliant, ComponentLink1Description=https://datasheet.octopart.com:443/RC0805JR-131K5L-Yageo-datasheet-175887523.pdf?src-supplier=IHS, ComponentLink1URL=https://datasheet.octopart.com:443/RC0805JR-131K5L-Yageo-datasheet-175887523.pdf?src-supplier=IHS, ComponentLink2Description=https://datasheet.octopart.com:443/RC0805JR-131K5L-Yageo-Group-datasheet-176638170.pdf?src-supplier=Future+Electronics, ComponentLink2URL=https://datasheet.octopart.com:443/RC0805JR-131K5L-Yageo-Group-datasheet-176638170.pdf?src-supplier=Future+Electronics, ComponentLink3Description=https://datasheet.octopart.com:443/RC0805JR-131K5L-Yageo-Group-datasheet-164759695.pdf?src-supplier=Future+Electronics, ComponentLink3URL=https://datasheet.octopart.com:443/RC0805JR-131K5L-Yageo-Group-datasheet-164759695.pdf?src-supplier=Future+Electronics, ComponentLink4Description=https://datasheet.octopart.com:443/RC0805JR-131K5L-Yageo-datasheet-148775077.pdf?src-supplier=TME, ComponentLink4URL=https://datasheet.octopart.com:443/RC0805JR-131K5L-Yageo-datasheet-148775077.pdf?src-supplier=TME, ComponentLink5Description=https://datasheet.octopart.com/RC0805JR-131K5L-Yageo-datasheet-73766026.pdf, ComponentLink5URL=https://datasheet.octopart.com/RC0805JR-131K5L-Yageo-datasheet-73766026.pdf, ComponentLink6Description=http://sigma.octopart.com:80/conflict_mineral_statement/Yageo-company-3.pdf?src-supplier=Compliance+Statements, ComponentLink6URL=http://sigma.octopart.com:80/conflict_mineral_statement/Yageo-company-3.pdf?src-supplier=Compliance+Statements, ComponentLink7Description=http://sigma.octopart.com:80/rohs_statement/Yageo-company-2.pdf?src-supplier=Compliance+Statements, ComponentLink7URL=http://sigma.octopart.com:80/rohs_statement/Yageo-company-2.pdf?src-supplier=Compliance+Statements, Composition="Thick Film", Contact Plating="Lead, Tin", Country of Origin="Mainland China, Taiwan", Depth=1.25mm, Export Control Classification Number (ECCN) Code=EAR99, Harmonized Tariff Schedule (HTS) Code=8533.21.00.30, Height=500µm, Introduction Date=2004-09-22, Lead Free="Lead Free", Length=2mm, Lifecycle Status=Production, Manufacturer Part Number=RC0805JR-131K5L, Military Standard=Not, Mounting Technology="Surface Mount", Number of Terminals=2, Pricing="1=0.1, 10=0.032, 25=0.0236, 50=0.019, 100=0.0155, 250=0.01216, 500=0.01024, 1000=0.00873, 5000=0.00636 (USD)", Radiation Hardening=No, REACH SVHC=Unaffected, RoHS=Compliant, Stock=95872, Supplier=DigiKey, Termination=SMD/SMT, Width=1.25mm, Working Voltage=150V
R7 R8: library part RC0805FR-135K1L, "Res Thick Film 0805 5.1K Ohm 1% 0.125W(1/8W) ±100ppm/C Pad SMD T/R", Case Code (Imperial)=0805, Case Code (Metric)=2012, LCSC part#=C4200156, Manufacturer="Yageo Group", Max Operating Temperature=155°C, Min Operating Temperature=-55°C, Power Rating=125mW, Supplier Part Number=13-RC0805FR-135K1LDKR-ND, Temperature Coefficient=100ppm/°C, Tolerance=1%, Voltage Rating=150V, Case/Package=0805, Category="Chip SMD Resistors", China RoHS=Non-Compliant, ComponentLink1Description=https://datasheet.octopart.com:443/RC0805FR-135K1L-Yageo-datasheet-175887523.pdf?src-supplier=IHS, ComponentLink1URL=https://datasheet.octopart.com:443/RC0805FR-135K1L-Yageo-datasheet-175887523.pdf?src-supplier=IHS, ComponentLink2Description=https://datasheet.octopart.com:443/RC0805FR-135K1L-Yageo-Group-datasheet-176638170.pdf?src-supplier=Future+Electronics, ComponentLink2URL=https://datasheet.octopart.com:443/RC0805FR-135K1L-Yageo-Group-datasheet-176638170.pdf?src-supplier=Future+Electronics, ComponentLink3Description=https://datasheet.octopart.com:443/RC0805FR-135K1L-Yageo-datasheet-164759695.pdf?src-supplier=Future+Electronics, ComponentLink3URL=https://datasheet.octopart.com:443/RC0805FR-135K1L-Yageo-datasheet-164759695.pdf?src-supplier=Future+Electronics, ComponentLink4Description=https://datasheet.octopart.com/RC0805FR-135K1L-Yageo-datasheet-73766026.pdf, ComponentLink4URL=https://datasheet.octopart.com/RC0805FR-135K1L-Yageo-datasheet-73766026.pdf, ComponentLink5Description=http://sigma.octopart.com:80/conflict_mineral_statement/Yageo-company-3.pdf?src-supplier=Compliance+Statements, ComponentLink5URL=http://sigma.octopart.com:80/conflict_mineral_statement/Yageo-company-3.pdf?src-supplier=Compliance+Statements, ComponentLink6Description=http://sigma.octopart.com:80/rohs_statement/Yageo-company-2.pdf?src-supplier=Compliance+Statements, ComponentLink6URL=http://sigma.octopart.com:80/rohs_statement/Yageo-company-2.pdf?src-supplier=Compliance+Statements, Composition="Thick Film", Contact Plating=Tin, Country of Origin="Mainland China, Taiwan", Depth=1.25mm, Export Control Classification Number (ECCN) Code=EAR99, Harmonized Tariff Schedule (HTS) Code=8533.21.00.30, Height=500µm, Introduction Date=2004-09-22, Length=2mm, Lifecycle Status=Production, Manufacturer Part Number=RC0805FR-135K1L, Military Standard=Not, Mounting Technology="Surface Mount", Number of Terminals=2, Pricing="1=0.1, 10=0.034, 25=0.0256, 50=0.0208, 100=0.0171, 250=0.01344, 500=0.01136, 1000=0.00973, 5000=0.00715 (USD)", Radiation Hardening=No, REACH SVHC=Unaffected, RoHS=Compliant, Schedule B="8533210045, 8533210045|8533210045|8533210045|8533210045|8533210045", Stock=41211, Supplier=DigiKey, Termination=SMD/SMT, Width=1.25mm, Working Voltage=150V
R9: library part RMCF0805FT10K0, "Res Thick Film 0805 10K Ohm 1% 0.125W ±100ppm/°C Molded SMD Paper T/R", Case Code (Imperial)=0805, Case Code (Metric)=2012, LCSC part#=C237755, Manufacturer="Stackpole Electronics", Manufacturer Package Identifier="0805 (2012 metric)", Max Operating Temperature=155°C, Max Power Dissipation=125mW, Min Operating Temperature=-55°C, Ratings=AEC-Q200, Supplier Part Number=RMCF0805FT10K0DKR-ND, Temperature Coefficient=100ppm/°C, Tolerance=1%, Voltage Rating=150V, Case/Package=0805, Category="Chip SMD Resistors", China RoHS=Non-Compliant, ComponentLink1Description=https://datasheet.octopart.com:443/RMCF0805FT10K0-Stackpole-Electronics-datasheet-182148065.pdf?src-supplier=IHS, ComponentLink1URL=https://datasheet.octopart.com:443/RMCF0805FT10K0-Stackpole-Electronics-datasheet-182148065.pdf?src-supplier=IHS, ComponentLink2Description=https://datasheet.octopart.com:443/RMCF0805FT10K0-Stackpole-Electronics-datasheet-12534581.pdf?src-supplier=Upverter, ComponentLink2URL=https://datasheet.octopart.com:443/RMCF0805FT10K0-Stackpole-Electronics-datasheet-12534581.pdf?src-supplier=Upverter, ComponentLink3Description=https://datasheet.octopart.com:443/RMCF0805FT10K0-Stackpole-Electronics-datasheet-12510902.pdf?src-supplier=Upverter, ComponentLink3URL=https://datasheet.octopart.com:443/RMCF0805FT10K0-Stackpole-Electronics-datasheet-12510902.pdf?src-supplier=Upverter, ComponentLink4Description=https://datasheet.octopart.com:443/RMCF0805FT10K0-Stackpole-Electronics-datasheet-28504820.pdf?src-supplier=Master+Electronics, ComponentLink4URL=https://datasheet.octopart.com:443/RMCF0805FT10K0-Stackpole-Electronics-datasheet-28504820.pdf?src-supplier=Master+Electronics, ComponentLink5Description=https://datasheet.octopart.com:443/RMCF0805FT10K0-Stackpole-Electronics-datasheet-141193804.pdf?src-supplier=Stackpole+Electronics, ComponentLink5URL=https://datasheet.octopart.com:443/RMCF0805FT10K0-Stackpole-Electronics-datasheet-141193804.pdf?src-supplier=Stackpole+Electronics, ComponentLink6Description=https://datasheet.octopart.com:443/RMCF0805FT10K0-Stackpole-Electronics-datasheet-62091608.pdf?src-supplier=Stackpole+Electronics, ComponentLink6URL=https://datasheet.octopart.com:443/RMCF0805FT10K0-Stackpole-Electronics-datasheet-62091608.pdf?src-supplier=Stackpole+Electronics, ComponentLink7Description=https://datasheet.octopart.com:443/RMCF0805FT10K0-Stackpole-Electronics-datasheet-10788263.pdf?src-supplier=Stackpole+Electronics, ComponentLink7URL=https://datasheet.octopart.com:443/RMCF0805FT10K0-Stackpole-Electronics-datasheet-10788263.pdf?src-supplier=Stackpole+Electronics, ComponentLink8Description=https://datasheet.octopart.com:443/RMCF0805FT10K0-Stackpole-Electronics-datasheet-154799224.pdf?src-supplier=JRH+Electronics, ComponentLink8URL=https://datasheet.octopart.com:443/RMCF0805FT10K0-Stackpole-Electronics-datasheet-154799224.pdf?src-supplier=JRH+Electronics, ComponentLink9Description=https://datasheet.octopart.com:443/RMCF0805FT10K0-Stackpole-Electronics-datasheet-11546843.pdf?src-supplier=Arrow+Electronics, ComponentLink9URL=https://datasheet.octopart.com:443/RMCF0805FT10K0-Stackpole-Electronics-datasheet-11546843.pdf?src-supplier=Arrow+Electronics, ComponentLink10Description=https://datasheet.octopart.com:443/RMCF0805FT10K0-Stackpole-Electronics-datasheet-11547379.pdf?src-supplier=Future+Electronics, ComponentLink10URL=https://datasheet.octopart.com:443/RMCF0805FT10K0-Stackpole-Electronics-datasheet-11547379.pdf?src-supplier=Future+Electronics, ComponentLink11Description=https://datasheet.octopart.com:443/RMCF0805FT10K0-Stackpole-Electronics-datasheet-8359789.pdf?src-supplier=Future+Electronics, ComponentLink11URL=https://datasheet.octopart.com:443/RMCF0805FT10K0-Stackpole-Electronics-datasheet-8359789.pdf?src-supplier=Future+Electronics, ComponentLink12Description=https://datasheet.octopart.com:443/RMCF0805FT10K0-Stackpole-Electronics-datasheet-8324226.pdf?src-supplier=Future+Electronics, ComponentLink12URL=https://datasheet.octopart.com:443/RMCF0805FT10K0-Stackpole-Electronics-datasheet-8324226.pdf?src-supplier=Future+Electronics, ComponentLink13Description=https://datasheet.octopart.com:443/RMCF0805FT10K0-Stackpole-Electronics-datasheet-8088878.pdf?src-supplier=Future+Electronics, ComponentLink13URL=https://datasheet.octopart.com:443/RMCF0805FT10K0-Stackpole-Electronics-datasheet-8088878.pdf?src-supplier=Future+Electronics, ComponentLink14Description=https://datasheet.octopart.com:443/RMCF0805FT10K0-Stackpole-Electronics-datasheet-5313682.pdf?src-supplier=Future+Electronics, ComponentLink14URL=https://datasheet.octopart.com:443/RMCF0805FT10K0-Stackpole-Electronics-datasheet-5313682.pdf?src-supplier=Future+Electronics, ComponentLink15Description=http://sigma.octopart.com:80/15940719/materials_sheet/Stackpole-Electronics-RMCF0805FT10K0.pdf?src-supplier=Compliance+Statements, ComponentLink15URL=http://sigma.octopart.com:80/15940719/materials_sheet/Stackpole-Electronics-RMCF0805FT10K0.pdf?src-supplier=Compliance+Statements, ComponentLink16Description=http://sigma.octopart.com:80/141158211/reach_statement/Stackpole-Electronics-RMCF0805FT10K0.pdf?src-supplier=Compliance+Statements, ComponentLink16URL=http://sigma.octopart.com:80/141158211/reach_statement/Stackpole-Electronics-RMCF0805FT10K0.pdf?src-supplier=Compliance+Statements, ComponentLink17Description=http://sigma.octopart.com:80/141158212/rohs_statement/Stackpole-Electronics-RMCF0805FT10K0.pdf?src-supplier=Compliance+Statements, ComponentLink17URL=http://sigma.octopart.com:80/141158212/rohs_statement/Stackpole-Electronics-RMCF0805FT10K0.pdf?src-supplier=Compliance+Statements, Composition="Thick Film", Contact Plating=Tin, Depth=1.25mm, Features="Automotive AEC-Q200", Height=500µm, Lead Free="Lead Free", Length=2mm, Lifecycle Status=Production, Manufacturer Part Number=RMCF0805FT10K0, Military Standard=Not, Mounting Technology="Surface Mount", Number of Terminals=2, Number of Terminations=2, Packaging="Cut Tape (CT)", Power Rating=125mW, Pricing="1=0.1, 10=0.027, 25=0.0196, 50=0.0156, 100=0.0127, 250=0.00988, 500=0.00824, 1000=0.00697 (USD)", Radiation Hardening=No, REACH SVHC=Unaffected, RoHS=Compliant, Schedule B="8533210045, 8533210045|8533210045, 8533210045|8533210045|8533210045, 8533210045|8533210045|8533210045|8533210045", Stock=3852379, Supplier=DigiKey, Width=1.25mm, Working Voltage=150V